# EAGLE board untitled (EAGLE 7.6.0)
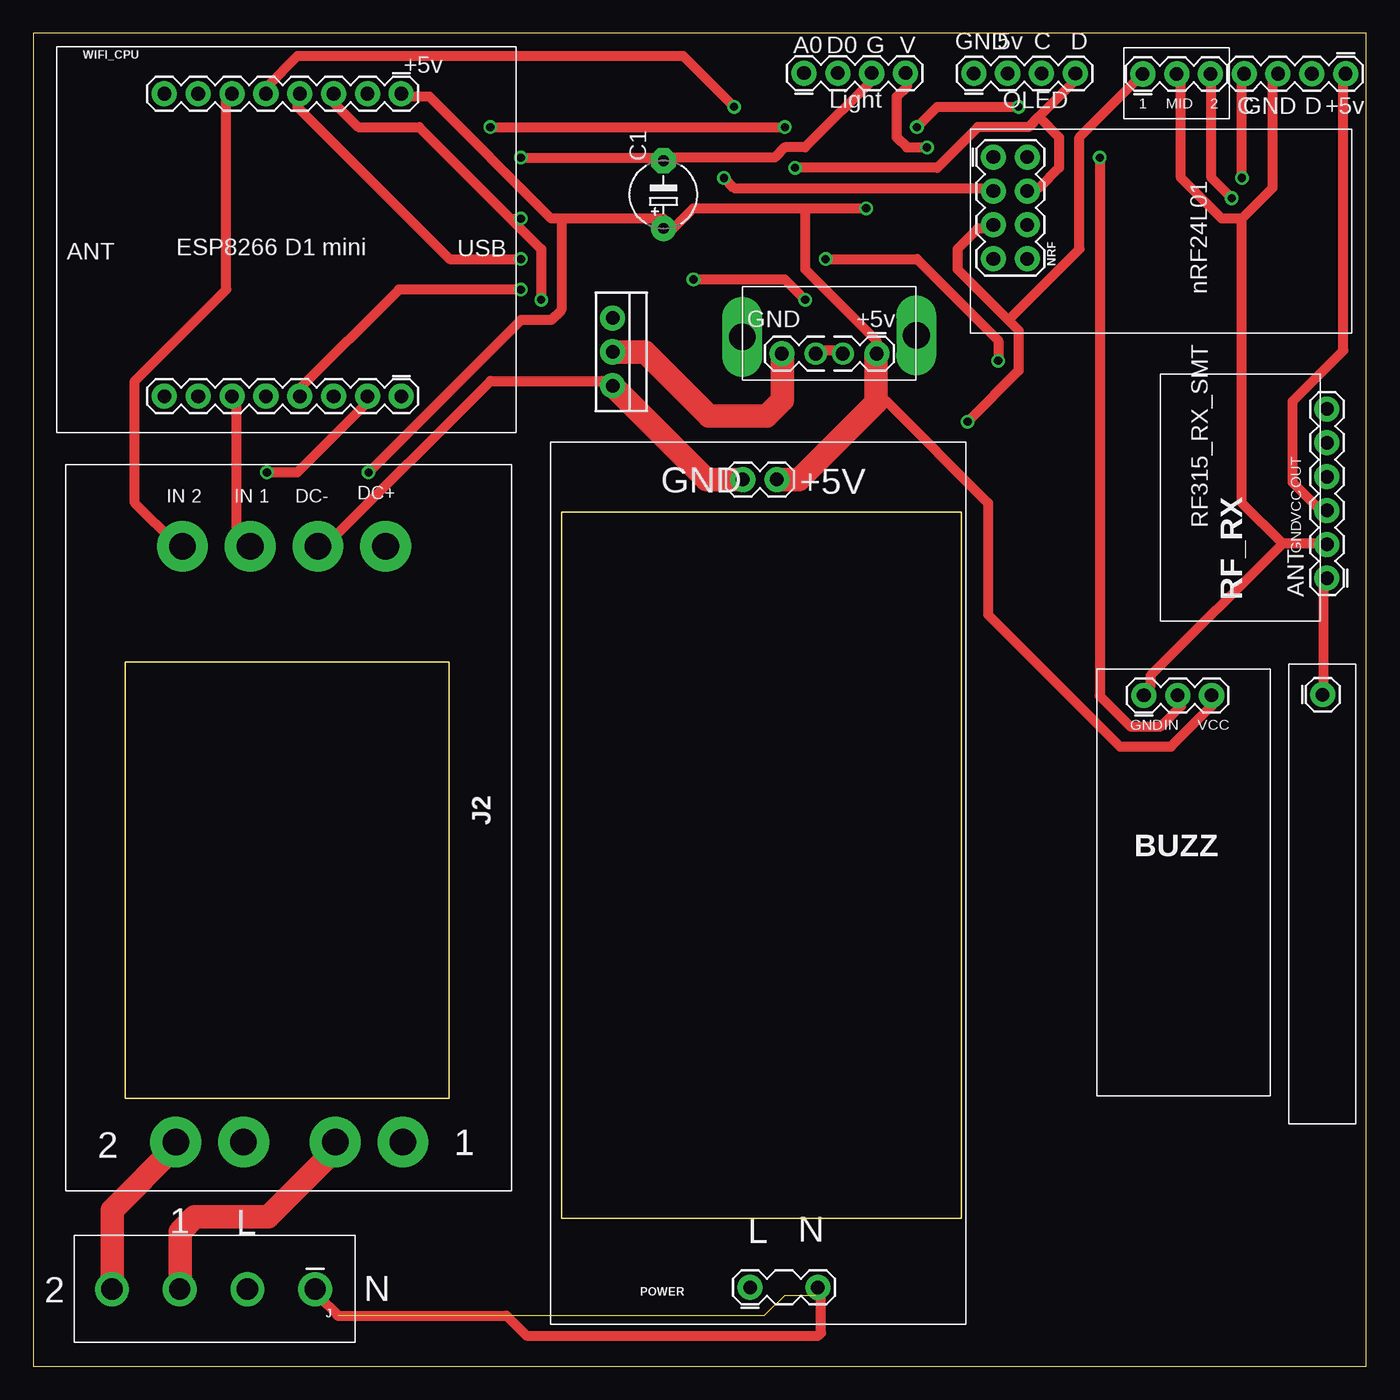
[diagram p0: board, top side]
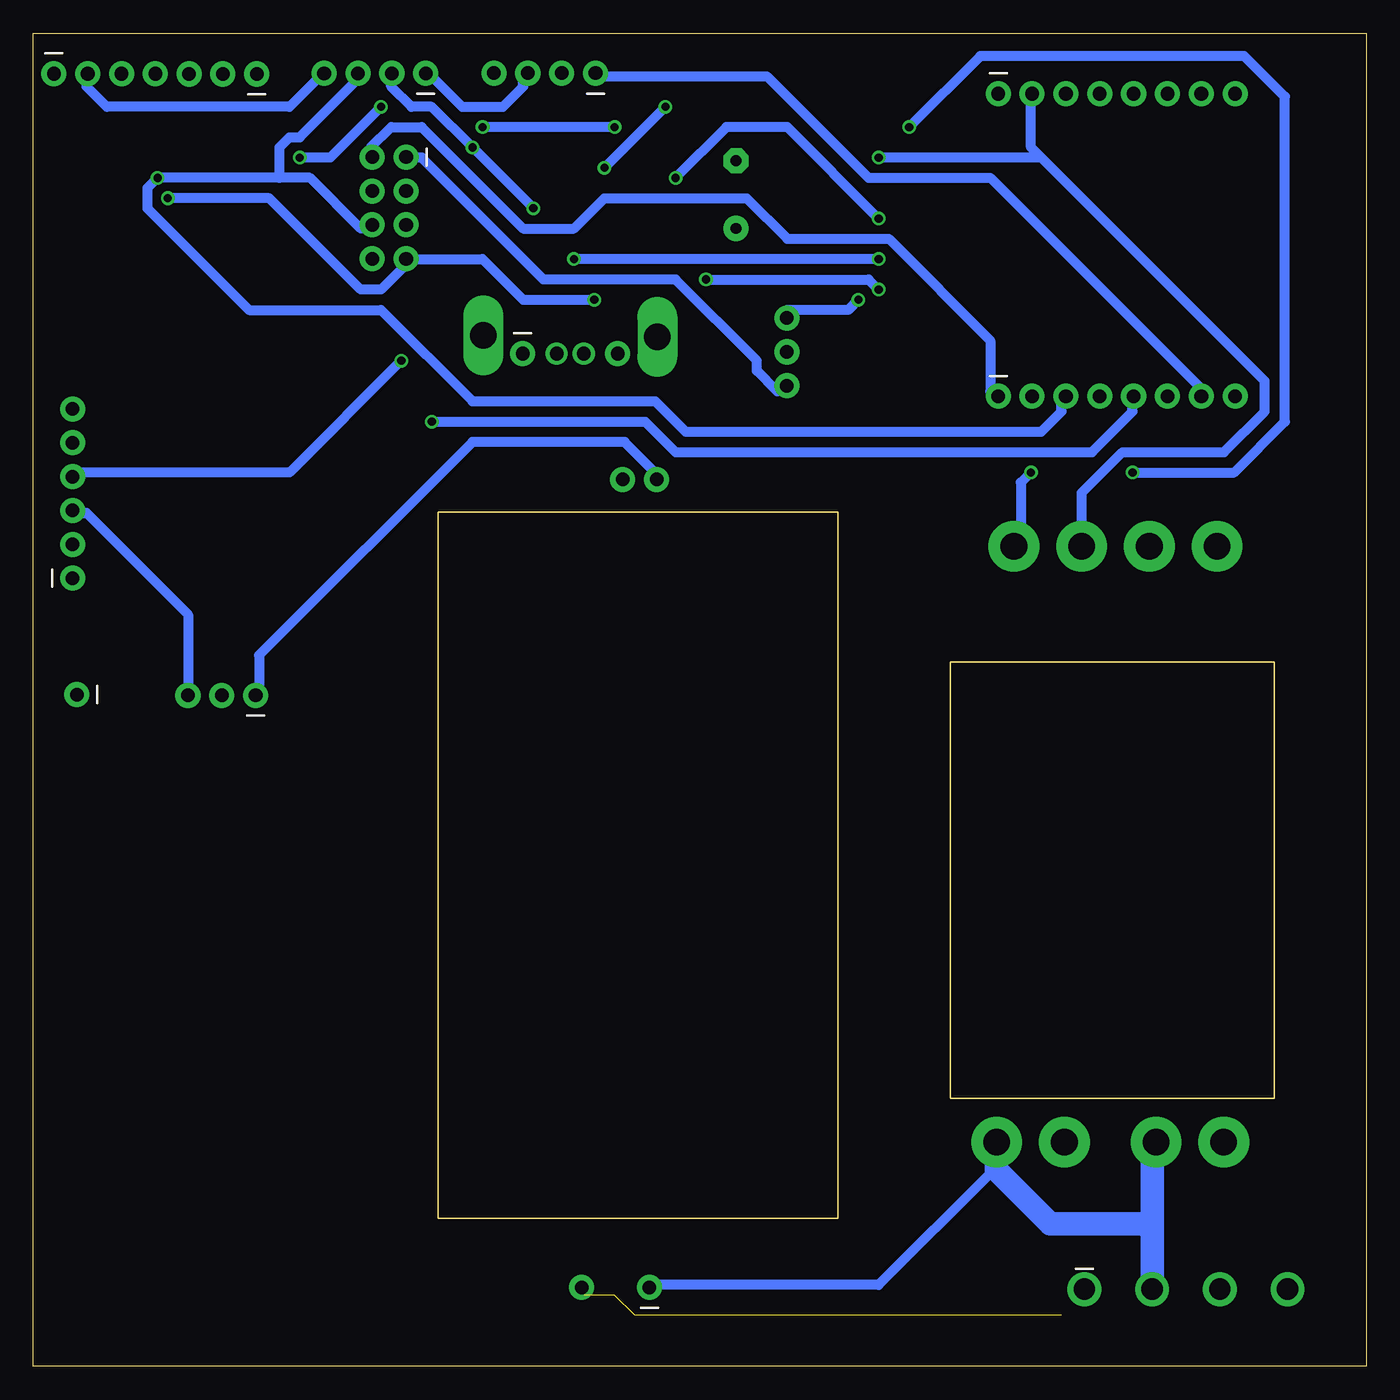
[diagram p1: board, bottom side, seen from below]

Size 100 x 100 mm. Coordinates in mm from the lower left corner, seen from the top.
Outline: 0,0 100,0 100,100 0,100 0,0
Copper layers (1*16): Top 0.035mm / dielectric 1.5mm / Bottom 0.035mm
Design rules "default *": minimum track width 30mil, minimum drill 24mil, track to track 30mil, track to pad 30mil, pad to pad 30mil, via to via 10mil, smd to smd 10mil, copper to edge 40mil, drill to drill 8mil, minimum pad ring 10mil, minimum via ring 8mil, stop-mask expansion 4mil, vias tented up to drill 0mil, thermal gap 10mil
tRestrict: 4 lines
bRestrict: 4 lines

## Footprints (pad centres in the part's own frame; a part is rotated, then mirrored left to right if it is on the bottom)
BUZZ_MODULE = drill 1.016 pad 1.88: 1 3.52,-1.97; 3 6.06,-1.97; 5 8.6,-1.97
E5-5 = drill 0.813 pad 1.905: + -2.54,0 | drill 0.813 pad 1.905 octagon: - 2.54,0
OUT_HEAD_4_AC_2CH = drill 1.6 pad 2.54: 1 -7.14,0.22; 2 -2.06,0.22; 3 3.02,0.22; 4 8.1,0.22
2_SOLID_RELAY = drill 2 pad 3.81: 1 -6.23,-29.32; 2 -1.15,-29.32; 3 3.93,-29.32; 4 9.01,-29.32; 5 -7.53,15.38; 6 -2.45,15.38; 7 4.43,15.38; 8 9.51,15.38
ANT_315 = drill 1.016 pad 1.88: 1 -4.68,0.03
USB_V_OUT = drill 1.016 pad 1.88: 1 2.92,1.53; 4 10.04,1.53 | drill 1.016 pad 1.676: 2 5.46,1.53; 3 7.5,1.53 | drill 2 pad 2.184 long: P$1 -0.05,0.17; P$2 13.02,0.27
LIGHT_DEC = drill 1.016 pad 1.88: 1 -3.68,2.03; 2 -1.14,2.03; 3 1.4,2.03; 4 3.94,2.03
SELECT_3 = drill 1.016 pad 1.88: 1 -3.98,2.03; 2 -1.44,2.03; 3 1.1,2.03
NRF24L01 = drill 1.016 pad 1.88: 1 -13.21,1.73; 2 -13.21,4.27; 3 -10.67,1.73; 4 -10.67,4.27; 5 -8.13,1.73; 6 -8.13,4.27; 7 -5.59,1.73; 8 -5.59,4.27
IIC_OLED = drill 1.016 pad 1.88: 1 -3.68,2.03; 2 -1.14,2.03; 3 1.4,2.03; 4 3.94,2.03
AC_DC_5V2A = drill 1.016 pad 1.88: 1 -30.19,9.84; 2 -30.19,4.76; 3 30.43,10.38; 4 30.43,7.84
315MHZ_RX_SMT = drill 1.016 pad 1.88: 1 -6.68,-6.86; 2 -4.14,-6.86; 3 -1.6,-6.86; 4 0.94,-6.86; 5 3.48,-6.86; 6 6.02,-6.86
IIC_TEMPERATURE = drill 1.016 pad 1.88: 1 -3.68,2.03; 2 -1.14,2.03; 3 1.4,2.03; 4 3.94,2.03
MOS_IRF520 = drill 1.016 pad 1.88: 1 -3.68,2.03; 2 -1.14,2.03; 3 1.4,2.03
ESP8266_MINI = drill 1.016 pad 1.88: 1 -10.61,1.53; 2 -8.07,1.53; 3 -5.53,1.53; 4 -2.99,1.53; 5 -0.45,1.53; 6 2.09,1.53; 7 4.63,1.53; 8 7.17,1.53; 9 -10.61,24.23; 10 -8.07,24.23; 11 -5.53,24.23; 12 -2.99,24.23; 13 -0.45,24.23; 14 2.09,24.23; 15 4.63,24.23; 16 7.17,24.23

## Placement (x,y rotation side)
BUZZ  [BUZZ_MODULE]  79.8,52.3 0 top
C1  [E5-5]  47.28,87.9 90 top
J  [OUT_HEAD_4_AC_2CH]  14,6 180 top
J2  [2_SOLID_RELAY]  20.2,32.2 180 top
J3  [ANT_315]  96.7,45.7 270 top
K1  [USB_V_OUT]  66.2,77.5 180 top
LIGHT  [LIGHT_DEC]  61.5,94.98 0 top
LOCAL  [SELECT_3]  87.22,94.92 0 top
NRF  [NRF24L01]  70.3,77.5 270 top
OLED  [IIC_OLED]  74.24,94.96 0 top
POWER  [AC_DC_5V2A]  63.62,36.1 90 top
RF_RX  [315MHZ_RX_SMT]  90.2,65.8 90 top
TEMPERATURE  [IIC_TEMPERATURE]  94.78,99 180 top
USB_CHARGE_MOS  [MOS_IRF520]  41.44,74.96 270 top
WIFI_CPU  [ESP8266_MINI]  17,97 180 top

## Library data of the parts
BUZZ J J2 J3 K1 LIGHT LOCAL NRF OLED POWER RF_RX TEMPERATURE USB_CHARGE_MOS WIFI_CPU = rx
C1 = resistor

## Nets
3V3: NRF.2 WIFI_CPU.9
+5V: BUZZ.5 C1.+ J2.1 K1.1 LIGHT.4 OLED.2 POWER.4 RF_RX.3 TEMPERATURE.1 WIFI_CPU.1
A0: LIGHT.1 WIFI_CPU.15
ANT: J3.1 RF_RX.1
D0: J2.3 WIFI_CPU.14
D1: J2.4 WIFI_CPU.6
D2: NRF.4 OLED.4 TEMPERATURE.2 WIFI_CPU.5
D3: RF_RX.4 WIFI_CPU.4
D4: NRF.3 USB_CHARGE_MOS.1 WIFI_CPU.3
D5: LOCAL.1 NRF.5 WIFI_CPU.13
D6: LOCAL.3 NRF.7 WIFI_CPU.12
D7: NRF.6 OLED.3 TEMPERATURE.4 WIFI_CPU.11
D8: BUZZ.3 WIFI_CPU.10
GND: BUZZ.1 C1.- J2.2 LIGHT.3 LOCAL.2 NRF.1 OLED.1 POWER.3 RF_RX.2 TEMPERATURE.3 USB_CHARGE_MOS.3 WIFI_CPU.2
L: J2.5 J2.7 J.2 POWER.1
MOS_OUT: K1.4 USB_CHARGE_MOS.2
N: J.1 POWER.2
N$2: K1.2 K1.3
N$3: LIGHT.2
N$6: NRF.8
OUT1: J2.6 J.3
OUT2: J2.8 J.4
RST: WIFI_CPU.16
RX: WIFI_CPU.7
TX: WIFI_CPU.8

## Tracks (layer width: path | path; a pad name or v marks a point on that pad's centre or on a via)
3V3
  Bottom 0.762: WIFI_CPU.9 28.19,73.15 28.19,76.96 35.81,84.58 43.43,84.58 46.48,87.63 57.15,87.63 59.44,85.34 63.25,85.34 70.87,92.96 73.15,92.96 74.68,91.44 NRF.2
+5V  (via drill 0.61)
  Top 0.762: TEMPERATURE.1 98.3,96.77 98.3,76.2 94.49,72.39 94.49,66.29 96.77,64.01 RF_RX.3 | v67.06,91.44 65.53,91.44 64.77,92.2 64.77,95.25 65.53,96.01 65.53,96.77 LIGHT.4 | 39.62,86.11 47.24,86.11 C1.+ 48.01,85.34 49.53,86.87 57.91,86.87 | 39.62,86.11 38.86,86.11 29.72,95.25 28.19,95.25 WIFI_CPU.1 | 57.91,86.87 v62.48,86.87 | v25.15,67.06 36.58,78.49 38.86,78.49 39.62,79.25 39.62,86.11 | 57.91,86.87 57.91,82.3 63.25,76.96 63.25,76.2 K1.1 | BUZZ.5 88.39,50.29 88.39,49.53 85.34,46.48 81.53,46.48 71.63,56.39 71.63,64.77 64.01,72.39 63.2,72.3
  Top 1.778: POWER.4 57.43,66.53 63.2,72.3 63.2,75.89 K1.1
  Bottom 0.762: BUZZ.5 88.39,51.05 88.39,56.39 96.01,64.01 96.77,64.01 RF_RX.3 | OLED.2 73.15,96.77 73.15,96.01 71.63,94.49 70.1,94.49 v67.06,91.44 v62.48,86.87 | v25.15,67.06 25.91,66.29 25.91,61.72 J2.1
A0
  Bottom 0.762: WIFI_CPU.15 12.19,73.15 28.19,89.15 37.34,89.15 44.96,96.77 57.15,96.77 LIGHT.1
ANT
  Top 0.762: J3.1 96.77,51.05 96.77,58.67 RF_RX.1
D0
  Top 0.762: WIFI_CPU.14 15.24,72.39 15.24,62.48 16,61.72 J2.3
D1
  Top 0.762: WIFI_CPU.6 14.48,95.25 14.48,80.77 7.62,73.91 7.62,64.77 10.67,61.72 J2.4
D2  (via drill 0.61)
  Top 0.762: v52.58,94.49 48.77,98.3 19.81,98.3 17.53,96.01 WIFI_CPU.5 | v57.15,89.92 67.82,89.92 70.87,92.96 74.68,92.96 75.44,93.73 | 75.44,93.73 78.49,96.77 OLED.4 | 75.44,93.73 76.96,92.2 76.96,89.92 75.44,88.39 74.68,88.39 NRF.4
  Bottom 0.762: v57.15,89.92 v52.58,94.49 | TEMPERATURE.2 96.01,96.77 96.01,96.01 94.49,94.49 80.77,94.49 78.49,96.77 OLED.4
D3  (via drill 0.61)
  Top 0.762: v72.39,75.44 72.39,76.96 66.29,83.06 v59.44,83.06 | v36.58,83.06 31.24,83.06 19.81,94.49 19.81,95.25 WIFI_CPU.4
  Bottom 0.762: v72.39,75.44 80.77,67.06 96.77,67.06 RF_RX.4 | v36.58,83.06 v59.44,83.06
D4  (via drill 0.61)
  Top 0.762: v38.1,80.01 38.1,83.82 35.81,86.11 | 35.81,86.11 28.96,92.96 24.38,92.96 22.1,95.25 WIFI_CPU.3 | v51.82,89.15 52.58,88.39 71.63,88.39 NRF.3 | 35.81,86.11 v36.58,86.11
  Bottom 0.762: v38.1,80.01 38.86,79.25 43.43,79.25 USB_CHARGE_MOS.1 | v51.82,89.15 48.01,92.96 43.43,92.96 v36.58,86.11
D5  (via drill 0.61)
  Top 0.762: v70.1,70.87 73.91,74.68 73.91,77.72 73.15,78.49 | 73.15,78.49 69.34,82.3 69.34,83.82 70.87,85.34 71.63,85.34 NRF.5 | 73.15,78.49 78.49,83.82 78.49,92.2 83.06,96.77 LOCAL.1
  Bottom 0.762: v70.1,70.87 54.1,70.87 51.82,68.58 20.57,68.58 17.53,71.63 17.53,72.39 WIFI_CPU.13
D6  (via drill 0.61)
  Top 0.762: v36.58,80.77 27.43,80.77 19.81,73.15 WIFI_CPU.12 | v49.53,81.53 56.39,81.53 v57.91,80.01 | v89.92,87.63 88.39,89.15 88.39,96.77 LOCAL.3
  Bottom 0.762: v36.58,80.77 37.34,81.53 v49.53,81.53 | v57.91,80.01 63.25,80.01 66.29,83.06 71.63,83.06 | v89.92,87.63 82.3,87.63 75.44,80.77 73.91,80.77 71.63,83.06 | 71.63,83.06 NRF.7
D7  (via drill 0.61)
  Top 0.762: v90.68,89.15 90.68,96.77 TEMPERATURE.4
  Bottom 0.762: 81.53,89.15 79.25,89.15 75.44,85.34 74.68,85.34 NRF.6 | 81.53,89.15 v90.68,89.15 91.44,88.39 91.44,86.87 83.82,79.25 73.91,79.25 67.06,72.39 53.34,72.39 51.05,70.1 24.38,70.1 22.86,71.63 22.86,72.39 WIFI_CPU.11 | 81.53,89.15 81.53,91.44 80.77,92.2 80.01,92.2 75.44,96.77 OLED.3
D8  (via drill 0.61)
  Top 0.762: v80.01,90.68 80.01,50.29 82.3,48.01 84.58,48.01 86.11,49.53 86.11,50.29 BUZZ.3 | v73.91,94.49 67.82,94.49 v66.29,92.96 | v34.29,92.96 v56.39,92.96 | v17.53,67.06 19.81,67.06 25.15,72.39 WIFI_CPU.10
  Bottom 0.762: v80.01,90.68 77.72,90.68 v73.91,94.49 | v56.39,92.96 v66.29,92.96 | v34.29,92.96 28.96,98.3 9.14,98.3 6.1,95.25 6.1,70.87 9.91,67.06 v17.53,67.06
GND  (via drill 0.61)
  Top 0.762: 90.68,86.11 89.15,86.11 86.11,89.15 86.11,96.77 LOCAL.2 | 90.68,86.11 92.96,88.39 92.96,96.77 TEMPERATURE.3 | 93.73,61.72 83.82,51.82 83.82,51.05 BUZZ.1 | 93.73,61.72 96.77,61.72 RF_RX.2 | 90.68,86.11 90.68,64.77 93.73,61.72 | LIGHT.3 63.25,96.77 57.91,91.44 56.39,91.44 55.63,90.68 48.01,90.68 C1.- 47.24,90.68 v36.58,90.68 | USB_CHARGE_MOS.3 42.67,73.91 34.29,73.91 22.1,61.72 J2.2
  Top 1.778: POWER.3 50.5,66.53 USB_CHARGE_MOS.3
  Bottom 0.762: NRF.1 71.63,90.68 70.87,90.68 61.72,81.53 51.82,81.53 45.72,75.44 45.72,74.68 44.2,73.15 USB_CHARGE_MOS.3 | LIGHT.3 63.25,96.77 63.25,96.01 64.77,94.49 67.82,94.49 70.1,96.77 OLED.1 | 24.38,90.68 7.62,73.91 7.62,71.63 10.67,68.58 18.29,68.58 21.34,65.53 21.34,61.72 J2.2 | 24.38,90.68 25.15,91.44 25.15,95.25 WIFI_CPU.2 | 24.38,90.68 v36.58,90.68 | BUZZ.1 83.06,51.05 83.06,53.34 67.06,69.34 55.63,69.34 53.34,67.06 POWER.3
L
  Bottom 0.762: POWER.1 53.34,6.1 36.58,6.1 28.19,14.48 27.73,14.73
  Bottom 1.778: J.2 16.06,10.1 | 16.06,10.1 16.06,16.53 J2.7 | J2.5 27.73,14.73 23.7,10.7 16.66,10.7 16.06,10.1
MOS_OUT
  Top 1.778: USB_CHARGE_MOS.2 45.9,76.1 50.7,71.3 55,71.3 56.2,72.5 56.2,75.93 K1.4
N  (3 unrouted)
  Top 0.762: 22.86,3.81 21.34,5.33 J.1 | 58.67,5.33 POWER.2
N$1
  Top 0.762: 22.8,3.8 35.5,3.8 37,2.3 58.9,2.3 59.1,2.5 59.1,5.7 59,5.8
N$2
  Top 0.762: K1.3 59.44,76.2 60.2,76.2 K1.2
OUT1
  Top 1.778: J2.6 22.65,16.25 17.6,11.2 12.1,11.2 11,10.1 11,5.8 J.3
OUT2
  Top 1.778: J2.8 10.69,16.49 5.9,11.7 J.4